# Altium PCB PCB.pcbdoc (part 2 of 2)
Units mm, origin at the board's own origin, x right, y up, seen from the top; angles counter-clockwise.
Board outline 290.83 x 119.38 mm, 2 copper layers (Top Layer, Bottom Layer); 91 components, 196 nets, 972 pads, 129 vias.
Unrouted connection lines stored in the file: 1.
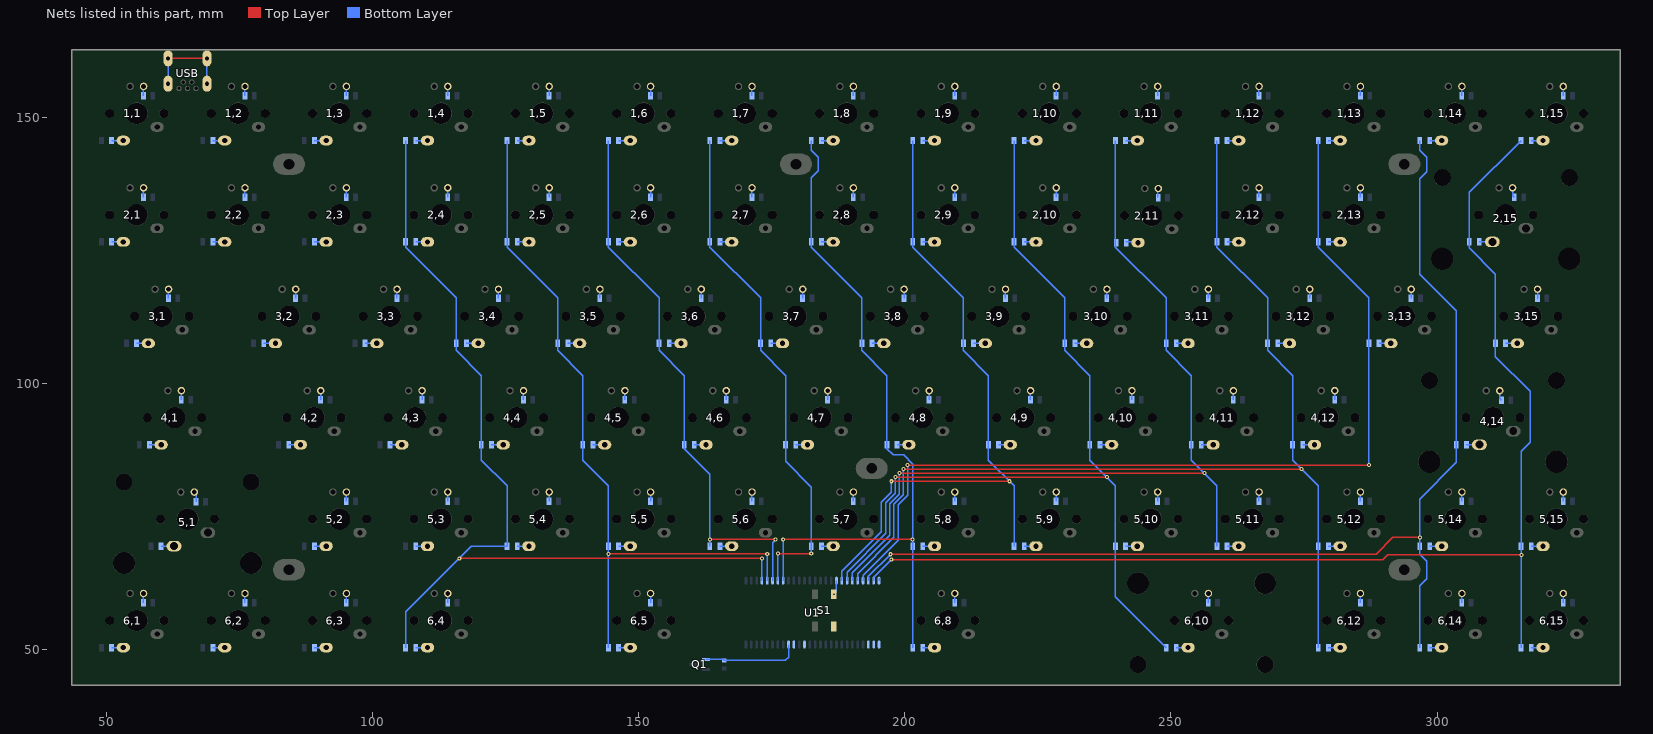
[diagram p2: the nets of this part, all layers, seen from the top]

## Via types
v1: diameter 0.762, hole 0.356, Top Layer to Bottom Layer, 129 vias

## Nets (pads, with @x,y where several pads share a name; then routed paths per layer and width w, separated by ;. In a path a pad name is that pad's centre, name@x,y a point inside that pad or via, vN(x,y) a via of type N, cw(c..) or ccw(c..) an arc to the next point about the centre after c; other vN are vias at no path point) (continued)
LIE4: 1,4.2 2,4.2 3,4.2 4,4.2 5,4.2 6,4.2 U1.4 | length 176
  Top Layer w0.254: v1(116.332,67.183) v1(173.18,67.183)
  Bottom Layer w0.254: 106.248,50.418 106.248,57.099 118.617,69.468 125.298,69.468 125.298,80.823 120.472,85.649 120.472,88.518 120.472,101.524 115.773,106.223 115.773,107.568 115.773,116.129 106.248,125.654 106.248,126.618 106.248,145.668 ; U1.4@173.18,62.992 v1(173.18,67.183)
LIE5: 1,5.2 2,5.2 3,5.2 4,5.2 5,5.2 6,5.2 U1.5 | length 138
  Top Layer w0.254: v1(144.335,68.009) v1(174.18,68.009)
  Bottom Layer w0.254: 125.298,145.668 125.298,126.618 125.298,125.654 134.823,116.129 134.823,107.568 134.823,106.223 139.522,101.524 139.522,88.518 139.522,85.649 144.348,80.823 144.348,69.468 144.348,50.418 ; U1.5@174.18,62.992 v1(174.18,68.009)
LIE6: 1,6.2 2,6.2 3,6.2 4,6.2 5,6.2 U1.6 | length 104.5
  Top Layer w0.254: v1(163.398,70.739) v1(175.768,70.739)
  Bottom Layer w0.254: 144.348,145.668 144.348,126.618 144.348,125.654 153.873,116.129 153.873,107.568 153.873,106.223 158.572,101.524 158.572,88.518 158.572,87.808 163.398,82.982 163.398,69.468 ; U1.6@175.18,62.992 175.18,70.151 v1(175.768,70.739)
LIE7: 1,7.2 2,7.2 3,7.2 4,7.2 5,7.2 U1.7 | length 96.8
  Top Layer w0.254: v1(176.18,68.072) v1(182.448,68.072)
  Bottom Layer w0.254: 163.398,145.668 163.398,126.618 163.398,125.654 172.923,116.129 172.923,107.568 172.923,106.223 177.622,101.524 177.622,88.518 177.622,85.395 182.448,80.569 182.448,69.468 v1(182.448,68.072) ; U1.7@176.18,62.992 v1(176.18,68.072)
LIE8: 1,8.2 2,8.2 3,8.2 4,8.2 5,8.2 6,8.2 U1.8 | length 137.4
  Top Layer w0.254: v1(177.18,70.739) v1(201.498,70.739)
  Bottom Layer w0.254: U1.8@177.18,62.992 v1(177.18,70.739) ; 182.448,145.668 182.448,143.8 183.769,142.479 183.769,139.954 182.448,138.633 182.448,126.618 182.448,125.654 191.973,116.129 191.973,107.568 191.973,106.223 196.672,101.524 196.672,88.518 196.672,87.808 197.879,86.601 199.784,86.601 201.498,84.887 v1(201.498,70.739) 201.498,69.468 201.498,50.418
LIE9: 1,9.2 2,9.2 3,9.2 4,9.2 5,9.2 U1.19 | length 128.8
  Top Layer w0.254: v1(197.485,81.661) v1(219.71,81.661)
  Bottom Layer w0.254: U1.19@188.18,62.992 188.18,64.736 195.58,72.136 195.58,77.724 197.485,79.629 v1(197.485,81.661) ; 201.498,145.668 201.498,126.618 201.498,125.654 211.023,116.129 211.023,107.568 211.023,106.223 215.722,101.524 215.722,88.518 215.722,85.649 220.548,80.823 220.548,69.468
LIE10: 1,10.2 2,10.2 3,10.2 4,10.2 5,10.2 6,10.2 U1.20 | length 170
  Top Layer w0.254: v1(198.247,82.423) v1(237.998,82.423)
  Bottom Layer w0.254: U1.20@189.18,62.992 189.18,64.593 196.469,71.882 196.469,77.597 198.247,79.375 v1(198.247,82.423) ; 220.548,145.668 220.548,126.618 220.548,125.654 230.073,116.129 230.073,107.568 230.073,106.223 234.772,101.524 234.772,88.518 234.772,85.649 239.598,80.823 239.598,69.468 239.598,59.943 249.123,50.418
LIE11: 1,11.2 2,11.2 3,11.2 4,11.2 5,11.2 U1.21 | length 165.2
  Top Layer w0.254: v1(199.009,83.185) v1(256.286,83.185)
  Bottom Layer w0.254: U1.21@190.18,62.992 190.18,64.45 197.231,71.501 197.231,77.47 199.009,79.248 v1(199.009,83.185) ; 239.598,145.668 239.598,125.654 249.123,116.129 249.123,107.568 249.123,106.223 253.822,101.524 253.822,88.518 253.822,85.649 258.648,80.823 258.648,69.468
LIE12: 1,12.2 2,12.2 3,12.2 4,12.2 5,12.2 6,12.2 U1.22 | length 202.5
  Top Layer w0.254: v1(199.771,83.947) v1(274.574,83.947)
  Bottom Layer w0.254: U1.22@191.18,62.992 191.18,64.307 197.993,71.12 197.993,77.343 199.771,79.121 v1(199.771,83.947) ; 258.648,145.668 258.648,126.618 258.648,125.654 268.173,116.129 268.173,107.568 268.173,106.223 272.872,101.524 272.872,88.518 272.872,85.649 277.698,80.823 277.698,69.468 277.698,50.418
LIE13: 1,13.2 2,13.2 3,13.2 U1.23 | length 176.8
  Top Layer w0.254: v1(200.533,84.709) v1(287.223,84.709)
  Bottom Layer w0.254: U1.23@192.18,62.992 192.18,64.037 198.755,70.612 198.755,77.216 200.533,78.994 v1(200.533,84.709) ; 277.698,145.668 277.698,126.618 277.698,125.654 287.223,116.129 287.223,107.568 v1(287.223,84.709)
LIE14: 1,14.2 4,14.2 5,14.2 6,14.2 U1.24 | length 210.6
  Top Layer w0.254: v1(197.358,67.945) 288.544,67.945 291.719,71.12 v1(296.799,71.12)
  Bottom Layer w0.254: U1.24@193.18,62.992 193.18,63.767 v1(197.358,67.945) ; 296.748,50.418 296.748,62.052 298.069,63.373 298.069,66.624 296.748,67.945 296.748,69.468 296.748,78.308 303.632,85.192 303.632,88.519 303.632,113.69 296.748,120.574 296.748,138.506 298.069,139.827 298.069,142.494 296.748,143.815 296.748,145.668
LIE15: 1,15.2 2,15.2 3,15.2 5,15.2 6,15.2 U1.25 | length 228.8
  Top Layer w0.254: v1(197.485,66.929) 289.814,66.929 290.703,67.818 v1(315.849,67.818)
  Bottom Layer w0.254: U1.25@194.18,62.992 194.18,63.624 v1(197.485,66.929) ; 315.798,50.418 315.798,69.468 315.798,87.325 317.5,89.027 317.5,98.552 310.972,105.08 310.972,107.568 310.972,120.574 306.045,125.501 306.045,126.619 306.045,135.915 315.798,145.668
LIE16: U1.26 | length 0.5
  Bottom Layer w0.254: U1.26@195.18,62.992 U1.26@195.18,63.481
LIE17: U1.27
LIE18: U1.28
LIE19: U1.29
Net1,1_4: 1,1.4 1,1.7 | length 1.8
  Bottom Layer w0.254: 57.003,154.101 57.003,155.809 57.023,155.829 57.035,155.817
Net1,1_5: 1,1.5 1,1.6 | length 2.2
  Bottom Layer w0.254: 51.003,145.668 53.212,145.668
Net1,2_4: 1,2.4 1,2.7 | length 1.8
  Bottom Layer w0.254: 76.053,154.101 76.053,155.809 76.073,155.829 76.085,155.817
Net1,2_5: 1,2.5 1,2.6 | length 2.4
  Bottom Layer w0.254: 70.053,145.668 72.262,145.668 ; 72.143,145.789 72.263,145.669
Net1,3_4: 1,3.4 1,3.7 | length 1.8
  Bottom Layer w0.254: 95.103,154.101 95.103,155.809 95.123,155.829 ; 95.123,155.829 95.135,155.817 95.123,155.829
Net1,3_5: 1,3.5 1,3.6 | length 2.5
  Bottom Layer w0.254: 89.103,145.668 91.312,145.668 ; 91.193,145.789 91.313,145.669 91.193,145.789
Net1,4_4: 1,4.4 1,4.7 | length 1.8
  Bottom Layer w0.254: 114.153,154.101 114.153,155.809 114.173,155.829 114.185,155.817
Net1,4_5: 1,4.5 1,4.6 | length 2.4
  Bottom Layer w0.254: 108.153,145.668 110.362,145.668 ; 110.243,145.789 110.363,145.669
Net1,5_4: 1,5.4 1,5.7 | length 1.8
  Bottom Layer w0.254: 133.203,154.101 133.203,155.809 133.223,155.829 133.235,155.817
Net1,5_5: 1,5.5 1,5.6 | length 2.4
  Bottom Layer w0.254: 127.203,145.668 129.412,145.668 ; 129.293,145.789 129.413,145.669
Net1,6_4: 1,6.4 1,6.7 | length 1.8
  Bottom Layer w0.254: 152.253,154.101 152.253,155.809 152.273,155.829 152.285,155.817
Net1,6_5: 1,6.5 1,6.6 | length 2.4
  Bottom Layer w0.254: 146.253,145.668 148.462,145.668 ; 148.343,145.789 148.463,145.669
Net1,7_4: 1,7.4 1,7.7 | length 1.8
  Bottom Layer w0.254: 171.303,154.101 171.303,155.809 171.323,155.829 171.335,155.817
Net1,7_5: 1,7.5 1,7.6 | length 2.4
  Bottom Layer w0.254: 165.303,145.668 167.512,145.668 ; 167.393,145.789 167.513,145.669
Net1,8_4: 1,8.4 1,8.7 | length 1.8
  Bottom Layer w0.254: 190.353,154.101 190.353,155.809 190.373,155.829 190.385,155.817
Net1,8_5: 1,8.5 1,8.6 | length 2.4
  Bottom Layer w0.254: 184.353,145.668 186.562,145.668 ; 186.443,145.789 186.563,145.669
Net1,9_4: 1,9.4 1,9.7 | length 1.8
  Bottom Layer w0.254: 209.403,154.101 209.403,155.809 209.423,155.829 209.435,155.817
Net1,9_5: 1,9.5 1,9.6 | length 2.4
  Bottom Layer w0.254: 203.403,145.668 205.612,145.668 ; 205.493,145.789 205.613,145.669
Net1,10_4: 1,10.4 1,10.7 | length 1.8
  Bottom Layer w0.254: 228.453,154.101 228.453,155.809 228.473,155.829 228.485,155.817
Net1,10_5: 1,10.5 1,10.6 | length 2.4
  Bottom Layer w0.254: 222.453,145.668 224.662,145.668 ; 224.543,145.789 224.663,145.669
Net1,11_4: 1,11.4 1,11.7 | length 1.8
  Bottom Layer w0.254: 247.503,154.101 247.503,155.809 247.523,155.829 247.535,155.817
Net1,11_5: 1,11.5 1,11.6 | length 2.4
  Bottom Layer w0.254: 241.503,145.668 243.712,145.668 ; 243.593,145.789 243.713,145.669
Net1,12_4: 1,12.4 1,12.7 | length 1.8
  Bottom Layer w0.254: 266.553,154.101 266.553,155.809 266.573,155.829 266.585,155.817
Net1,12_5: 1,12.5 1,12.6 | length 2.4
  Bottom Layer w0.254: 260.553,145.668 262.762,145.668 ; 262.643,145.789 262.763,145.669
Net1,13_4: 1,13.4 1,13.7 | length 1.8
  Bottom Layer w0.254: 285.603,154.101 285.603,155.809 285.623,155.829 285.635,155.817
Net1,13_5: 1,13.5 1,13.6 | length 2.4
  Bottom Layer w0.254: 279.603,145.668 281.812,145.668 ; 281.693,145.789 281.813,145.669
Net1,14_4: 1,14.4 1,14.7 | length 1.8
  Bottom Layer w0.254: 304.653,154.101 304.653,155.809 304.673,155.829 304.685,155.817
Net1,14_5: 1,14.5 1,14.6 | length 2.4
  Bottom Layer w0.254: 298.653,145.668 300.862,145.668 ; 300.743,145.789 300.863,145.669
Net1,15_4: 1,15.4 1,15.7 | length 1.7
  Bottom Layer w0.254: 323.703,154.101 323.723,154.121 323.723,155.829
Net1,15_5: 1,15.5 1,15.6 | length 2.2
  Bottom Layer w0.254: 317.703,145.668 319.912,145.668
Net2,1_4: 2,1.4 2,1.7 | length 1.8
  Bottom Layer w0.254: 57.003,135.051 57.003,136.759 57.023,136.779 57.035,136.767
Net2,1_5: 2,1.5 2,1.6 | length 2.4
  Bottom Layer w0.254: 51.003,126.618 53.212,126.618 ; 53.093,126.739 53.213,126.619
Net2,2_4: 2,2.4 2,2.7 | length 1.8
  Bottom Layer w0.254: 76.053,135.051 76.053,136.759 76.073,136.779 76.085,136.767
Net2,2_5: 2,2.5 2,2.6 | length 2.4
  Bottom Layer w0.254: 70.053,126.618 72.262,126.618 ; 72.143,126.739 72.263,126.619
Net2,3_4: 2,3.4 2,3.7 | length 1.8
  Bottom Layer w0.254: 95.103,135.051 95.103,136.759 95.123,136.779 95.135,136.767
Net2,3_5: 2,3.5 2,3.6 | length 2.4
  Bottom Layer w0.254: 89.103,126.618 91.312,126.618 ; 91.193,126.739 91.313,126.619
Net2,4_4: 2,4.4 2,4.7 | length 1.8
  Bottom Layer w0.254: 114.153,135.051 114.153,136.759 114.173,136.779 114.185,136.767
Net2,4_5: 2,4.5 2,4.6 | length 2.4
  Bottom Layer w0.254: 108.153,126.618 110.362,126.618 ; 110.243,126.739 110.363,126.619
Net2,5_4: 2,5.4 2,5.7 | length 1.8
  Bottom Layer w0.254: 133.203,135.051 133.203,136.759 133.223,136.779 133.235,136.767
Net2,5_5: 2,5.5 2,5.6 | length 2.4
  Bottom Layer w0.254: 127.203,126.618 129.412,126.618 ; 129.293,126.739 129.413,126.619
Net2,6_4: 2,6.4 2,6.7 | length 1.8
  Bottom Layer w0.254: 152.253,135.051 152.253,136.759 152.273,136.779 152.285,136.767
Net2,6_5: 2,6.5 2,6.6 | length 2.4
  Bottom Layer w0.254: 146.253,126.618 148.462,126.618 ; 148.343,126.739 148.463,126.619
Net2,7_4: 2,7.4 2,7.7 | length 1.8
  Bottom Layer w0.254: 171.303,135.051 171.303,136.759 171.323,136.779 171.335,136.767
Net2,7_5: 2,7.5 2,7.6 | length 2.4
  Bottom Layer w0.254: 165.303,126.618 167.512,126.618 ; 167.393,126.739 167.513,126.619
Net2,8_4: 2,8.4 2,8.7 | length 1.8
  Bottom Layer w0.254: 190.353,135.051 190.353,136.759 190.373,136.779 190.385,136.767
Net2,8_5: 2,8.5 2,8.6 | length 2.4
  Bottom Layer w0.254: 184.353,126.618 186.562,126.618 ; 186.443,126.739 186.563,126.619
Net2,9_4: 2,9.4 2,9.7 | length 1.8
  Bottom Layer w0.254: 209.403,135.051 209.403,136.759 209.423,136.779 209.435,136.767
Net2,9_5: 2,9.5 2,9.6 | length 2.4
  Bottom Layer w0.254: 203.403,126.618 205.612,126.618 ; 205.493,126.739 205.613,126.619
Net2,10_4: 2,10.4 2,10.7 | length 1.8
  Bottom Layer w0.254: 228.453,135.051 228.453,136.759 228.473,136.779 228.485,136.767
Net2,10_5: 2,10.5 2,10.6 | length 2.4
  Bottom Layer w0.254: 222.453,126.618 224.662,126.618 ; 224.543,126.739 224.663,126.619
Net2,11_4: 2,11.4 2,11.7 | length 1.8
  Bottom Layer w0.254: 247.503,135.051 247.503,136.759 247.523,136.779 247.535,136.767
Net2,11_5: 2,11.5 2,11.6 | length 2.4
  Bottom Layer w0.254: 241.503,126.618 243.712,126.618 ; 243.593,126.739 243.713,126.619
Net2,12_4: 2,12.4 2,12.7 | length 1.8
  Bottom Layer w0.254: 266.553,135.051 266.553,136.759 266.573,136.779 266.585,136.767
Net2,12_5: 2,12.5 2,12.6 | length 2.4
  Bottom Layer w0.254: 260.553,126.618 262.762,126.618 ; 262.643,126.739 262.763,126.619
Net2,13_4: 2,13.4 2,13.7 | length 1.7
  Bottom Layer w0.254: 285.603,135.051 285.623,135.071 285.623,136.779
Net2,13_5: 2,13.5 2,13.6 | length 2.2
  Bottom Layer w0.254: 279.603,126.618 281.812,126.618
Net2,15_4: 2,15.4 2,15.7 | length 1.9
  Bottom Layer w0.254: 314.198,136.779 314.198,135.331 314.528,135.001
Net2,15_5: 2,15.5 2,15.6 | length 2.4
  Bottom Layer w0.254: 307.95,126.619 310.388,126.619
Net3,1_4: 3,1.4 3,1.7 | length 1.8
  Bottom Layer w0.254: 61.702,116.001 61.702,117.709 61.722,117.729 61.734,117.717
Net3,1_5: 3,1.5 3,1.6 | length 2.2
  Bottom Layer w0.254: 55.702,107.568 57.911,107.568
Net3,2_4: 3,2.4 3,2.7 | length 1.8
  Bottom Layer w0.254: 85.578,116.001 85.578,117.709 85.598,117.729 85.61,117.717
Net3,2_5: 3,2.5 3,2.6 | length 2.4
  Bottom Layer w0.254: 79.578,107.568 81.787,107.568 ; 81.668,107.689 81.788,107.569
Net3,3_4: 3,3.4 3,3.7 | length 1.8
  Bottom Layer w0.254: 104.628,116.001 104.628,117.709 104.648,117.729 104.66,117.717
Net3,3_5: 3,3.5 3,3.6 | length 2.4
  Bottom Layer w0.254: 98.628,107.568 100.837,107.568 ; 100.718,107.689 100.838,107.569
Net3,4_4: 3,4.4 3,4.7 | length 1.8
  Bottom Layer w0.254: 123.678,116.001 123.678,117.709 123.698,117.729 123.71,117.717
Net3,4_5: 3,4.5 3,4.6 | length 2.4
  Bottom Layer w0.254: 117.678,107.568 119.887,107.568 ; 119.768,107.689 119.888,107.569
Net3,5_4: 3,5.4 3,5.7 | length 1.8
  Bottom Layer w0.254: 142.728,116.001 142.728,117.709 142.748,117.729 142.76,117.717
Net3,5_5: 3,5.5 3,5.6 | length 2.4
  Bottom Layer w0.254: 136.728,107.568 138.937,107.568 ; 138.818,107.689 138.938,107.569
Net3,6_4: 3,6.4 3,6.7 | length 1.8
  Bottom Layer w0.254: 161.778,116.001 161.778,117.709 161.798,117.729 161.81,117.717
Net3,6_5: 3,6.5 3,6.6 | length 2.4
  Bottom Layer w0.254: 155.778,107.568 157.987,107.568 ; 157.868,107.689 157.988,107.569
Net3,7_4: 3,7.4 3,7.7 | length 1.8
  Bottom Layer w0.254: 180.828,116.001 180.828,117.709 180.848,117.729 180.86,117.717
Net3,7_5: 3,7.5 3,7.6 | length 2.4
  Bottom Layer w0.254: 174.828,107.568 177.037,107.568 ; 176.918,107.689 177.038,107.569
Net3,8_4: 3,8.4 3,8.7 | length 1.8
  Bottom Layer w0.254: 199.878,116.001 199.878,117.709 199.898,117.729 199.91,117.717
Net3,8_5: 3,8.5 3,8.6 | length 2.4
  Bottom Layer w0.254: 193.878,107.568 196.087,107.568 ; 195.968,107.689 196.088,107.569
Net3,9_4: 3,9.4 3,9.7 | length 1.8
  Bottom Layer w0.254: 218.928,116.001 218.928,117.709 218.948,117.729 218.96,117.717
Net3,9_5: 3,9.5 3,9.6 | length 2.4
  Bottom Layer w0.254: 212.928,107.568 215.137,107.568 ; 215.018,107.689 215.138,107.569
Net3,10_4: 3,10.4 3,10.7 | length 1.8
  Bottom Layer w0.254: 237.978,116.001 237.978,117.709 237.998,117.729 238.01,117.717
Net3,10_5: 3,10.5 3,10.6 | length 2.4
  Bottom Layer w0.254: 231.978,107.568 234.187,107.568 ; 234.068,107.689 234.188,107.569
Net3,11_4: 3,11.4 3,11.7 | length 1.8
  Bottom Layer w0.254: 257.028,116.001 257.028,117.709 257.048,117.729 257.06,117.717
Net3,11_5: 3,11.5 3,11.6 | length 2.4
  Bottom Layer w0.254: 251.028,107.568 253.237,107.568 ; 253.118,107.689 253.238,107.569
Net3,12_4: 3,12.4 3,12.7 | length 1.8
  Bottom Layer w0.254: 276.078,116.001 276.078,117.709 276.098,117.729 276.11,117.717
Net3,12_5: 3,12.5 3,12.6 | length 2.4
  Bottom Layer w0.254: 270.078,107.568 272.287,107.568 ; 272.168,107.689 272.288,107.569
Net3,13_4: 3,13.4 3,13.7 | length 1.8
  Bottom Layer w0.254: 295.128,116.001 295.128,117.709 295.148,117.729 295.16,117.717
Net3,13_5: 3,13.5 3,13.6 | length 2.4
  Bottom Layer w0.254: 289.128,107.568 291.337,107.568 ; 291.218,107.689 291.338,107.569
Net3,15_4: 3,15.4 3,15.7 | length 1.7
  Bottom Layer w0.254: 318.877,116.001 318.897,116.021 318.897,117.729
Net3,15_5: 3,15.5 3,15.6 | length 2.2
  Bottom Layer w0.254: 312.877,107.568 315.086,107.568
Net4,1_4: 4,1.4 4,1.7 | length 1.8
  Bottom Layer w0.254: 64.115,96.951 64.115,98.659 64.135,98.679 64.147,98.667
Net4,1_5: 4,1.5 4,1.6 | length 2.2
  Bottom Layer w0.254: 58.115,88.518 60.324,88.518
Net4,2_4: 4,2.4 4,2.7 | length 1.8
  Bottom Layer w0.254: 90.277,96.951 90.277,98.659 90.297,98.679 90.309,98.667
Net4,2_5: 4,2.5 4,2.6 | length 2.4
  Bottom Layer w0.254: 84.277,88.518 86.486,88.518 ; 86.367,88.639 86.487,88.519
Net4,3_4: 4,3.4 4,3.7 | length 1.8
  Bottom Layer w0.254: 109.327,96.951 109.327,98.659 109.347,98.679 109.359,98.667
Net4,3_5: 4,3.5 4,3.6 | length 2.4
  Bottom Layer w0.254: 103.327,88.518 105.536,88.518 ; 105.417,88.639 105.537,88.519
Net4,4_4: 4,4.4 4,4.7 | length 1.8
  Bottom Layer w0.254: 128.377,96.951 128.377,98.659 128.397,98.679 128.409,98.667
Net4,4_5: 4,4.5 4,4.6 | length 2.4
  Bottom Layer w0.254: 122.377,88.518 124.586,88.518 ; 124.467,88.639 124.587,88.519
Net4,5_4: 4,5.4 4,5.7 | length 1.8
  Bottom Layer w0.254: 147.427,96.951 147.427,98.659 147.447,98.679 147.459,98.667
Net4,5_5: 4,5.5 4,5.6 | length 2.4
  Bottom Layer w0.254: 141.427,88.518 143.636,88.518 ; 143.517,88.639 143.637,88.519
Net4,6_4: 4,6.4 4,6.7 | length 1.8
  Bottom Layer w0.254: 166.477,96.951 166.477,98.659 166.497,98.679 166.509,98.667
Net4,6_5: 4,6.5 4,6.6 | length 2.4
  Bottom Layer w0.254: 160.477,88.518 162.686,88.518 ; 162.567,88.639 162.687,88.519
Net4,7_4: 4,7.4 4,7.7 | length 1.8
  Bottom Layer w0.254: 185.527,96.951 185.527,98.659 185.547,98.679 185.559,98.667
Net4,7_5: 4,7.5 4,7.6 | length 2.4
  Bottom Layer w0.254: 179.527,88.518 181.736,88.518 ; 181.617,88.639 181.737,88.519
Net4,8_4: 4,8.4 4,8.7 | length 1.8
  Bottom Layer w0.254: 204.577,96.951 204.577,98.659 204.597,98.679 204.609,98.667
Net4,8_5: 4,8.5 4,8.6 | length 2.4
  Bottom Layer w0.254: 198.577,88.518 200.786,88.518 ; 200.667,88.639 200.787,88.519
Net4,9_4: 4,9.4 4,9.7 | length 1.8
  Bottom Layer w0.254: 223.627,96.951 223.627,98.659 223.647,98.679 223.659,98.667
Net4,9_5: 4,9.5 4,9.6 | length 2.4
  Bottom Layer w0.254: 217.627,88.518 219.836,88.518 ; 219.717,88.639 219.837,88.519
Net4,10_4: 4,10.4 4,10.7 | length 1.8
  Bottom Layer w0.254: 242.677,96.951 242.677,98.659 242.697,98.679 242.709,98.667
Net4,10_5: 4,10.5 4,10.6 | length 2.4
  Bottom Layer w0.254: 236.677,88.518 238.886,88.518 ; 238.767,88.639 238.887,88.519
Net4,11_4: 4,11.4 4,11.7 | length 1.8
  Bottom Layer w0.254: 261.727,96.951 261.727,98.659 261.747,98.679 261.759,98.667
Net4,11_5: 4,11.5 4,11.6 | length 2.4
  Bottom Layer w0.254: 255.727,88.518 257.936,88.518 ; 257.817,88.639 257.937,88.519
Net4,12_4: 4,12.4 4,12.7 | length 1.8
  Bottom Layer w0.254: 280.777,96.951 280.777,98.659 280.797,98.679 280.809,98.667
Net4,12_5: 4,12.5 4,12.6 | length 2.4
  Bottom Layer w0.254: 274.777,88.518 276.986,88.518 ; 276.867,88.639 276.987,88.519
Net4,14_4: 4,14.4 4,14.7 | length 1.9
  Bottom Layer w0.254: 311.785,98.679 311.785,97.231 312.115,96.901
Net4,14_5: 4,14.5 4,14.6 | length 2.4
  Bottom Layer w0.254: 305.537,88.519 307.975,88.519
Net5,1_4: 5,1.4 5,1.7 | length 1.9
  Bottom Layer w0.254: 66.548,79.629 66.878,79.299 66.878,77.851
Net5,1_5: 5,1.5 5,1.6 | length 2.4
  Bottom Layer w0.254: 60.3,69.469 62.738,69.469
Net5,2_4: 5,2.4 5,2.7 | length 1.8
  Bottom Layer w0.254: 95.103,77.901 95.103,79.609 95.123,79.629 95.135,79.617
Net5,2_5: 5,2.5 5,2.6 | length 2.4
  Bottom Layer w0.254: 89.103,69.468 91.312,69.468 ; 91.193,69.589 91.313,69.469
Net5,3_4: 5,3.4 5,3.7 | length 1.8
  Bottom Layer w0.254: 114.153,77.901 114.153,79.609 114.173,79.629 114.185,79.617
Net5,3_5: 5,3.5 5,3.6 | length 2.4
  Bottom Layer w0.254: 108.153,69.468 110.362,69.468 ; 110.243,69.589 110.363,69.469
Net5,4_4: 5,4.4 5,4.7 | length 1.8
  Bottom Layer w0.254: 133.203,77.901 133.203,79.609 133.223,79.629 133.235,79.617
Net5,4_5: 5,4.5 5,4.6 | length 2.4
  Bottom Layer w0.254: 127.203,69.468 129.412,69.468 ; 129.293,69.589 129.413,69.469
Net5,5_4: 5,5.4 5,5.7 | length 1.8
  Bottom Layer w0.254: 152.253,77.901 152.253,79.609 152.273,79.629 152.285,79.617
Net5,5_5: 5,5.5 5,5.6 | length 2.4
  Bottom Layer w0.254: 146.253,69.468 148.462,69.468 ; 148.343,69.589 148.463,69.469
Net5,6_4: 5,6.4 5,6.7 | length 1.8
  Bottom Layer w0.254: 171.303,77.901 171.303,79.609 171.323,79.629 171.335,79.617
Net5,6_5: 5,6.5 5,6.6 | length 2.4
  Bottom Layer w0.254: 165.303,69.468 167.512,69.468 ; 167.393,69.589 167.513,69.469
Net5,7_4: 5,7.4 5,7.7 | length 1.8
  Bottom Layer w0.254: 190.353,77.901 190.353,79.609 190.373,79.629 190.385,79.617
Net5,7_5: 5,7.5 5,7.6 | length 2.4
  Bottom Layer w0.254: 184.353,69.468 186.562,69.468 ; 186.443,69.589 186.563,69.469
Net5,8_4: 5,8.4 5,8.7 | length 1.8
  Bottom Layer w0.254: 209.403,77.901 209.403,79.609 209.423,79.629 209.435,79.617
Net5,8_5: 5,8.5 5,8.6 | length 2.4
  Bottom Layer w0.254: 203.403,69.468 205.612,69.468 ; 205.493,69.589 205.613,69.469
Net5,9_4: 5,9.4 5,9.7 | length 1.8
  Bottom Layer w0.254: 228.453,77.901 228.453,79.609 228.473,79.629 228.485,79.617
Net5,9_5: 5,9.5 5,9.6 | length 2.4
  Bottom Layer w0.254: 222.453,69.468 224.662,69.468 ; 224.543,69.589 224.663,69.469
Net5,10_4: 5,10.4 5,10.7 | length 1.8
  Bottom Layer w0.254: 247.503,77.901 247.503,79.609 247.523,79.629 247.535,79.617
Net5,10_5: 5,10.5 5,10.6 | length 2.4
  Bottom Layer w0.254: 241.503,69.468 243.712,69.468 ; 243.593,69.589 243.713,69.469
Net5,11_4: 5,11.4 5,11.7 | length 1.8
  Bottom Layer w0.254: 266.553,77.901 266.553,79.609 266.573,79.629 266.585,79.617
Net5,11_5: 5,11.5 5,11.6 | length 2.4
  Bottom Layer w0.254: 260.553,69.468 262.762,69.468 ; 262.643,69.589 262.763,69.469
Net5,12_4: 5,12.4 5,12.7 | length 1.8
  Bottom Layer w0.254: 285.603,77.901 285.603,79.609 285.623,79.629 285.635,79.617
Net5,12_5: 5,12.5 5,12.6 | length 2.4
  Bottom Layer w0.254: 279.603,69.468 281.812,69.468 ; 281.693,69.589 281.813,69.469
Net5,14_4: 5,14.4 5,14.7 | length 1.8
  Bottom Layer w0.254: 304.653,77.901 304.653,79.609 304.673,79.629 304.685,79.617
Net5,14_5: 5,14.5 5,14.6 | length 2.4
  Bottom Layer w0.254: 298.653,69.468 300.862,69.468 ; 300.743,69.589 300.863,69.469
Net5,15_4: 5,15.4 5,15.7 | length 1.8
  Bottom Layer w0.254: 323.703,77.901 323.703,79.609 323.723,79.629 323.735,79.617
Net5,15_5: 5,15.5 5,15.6 | length 2.2
  Bottom Layer w0.254: 317.703,69.468 319.912,69.468
Net6,1_4: 6,1.4 6,1.7 | length 1.8
  Bottom Layer w0.254: 57.003,58.851 57.003,60.559 57.023,60.579 57.035,60.567
Net6,1_5: 6,1.5 6,1.6 | length 2.2
  Bottom Layer w0.254: 51.003,50.418 53.212,50.418
Net6,2_4: 6,2.4 6,2.7 | length 1.8
  Bottom Layer w0.254: 76.053,58.851 76.053,60.559 76.073,60.579 76.085,60.567
Net6,2_5: 6,2.5 6,2.6 | length 2.2
  Bottom Layer w0.254: 70.053,50.418 72.262,50.418
Net6,3_4: 6,3.4 6,3.7 | length 1.8
  Bottom Layer w0.254: 95.103,58.851 95.103,60.559 95.123,60.579 95.135,60.567
Net6,3_5: 6,3.5 6,3.6 | length 2.2
  Bottom Layer w0.254: 89.103,50.418 91.312,50.418
Net6,4_4: 6,4.4 6,4.7 | length 1.8
  Bottom Layer w0.254: 114.153,58.851 114.153,60.559 114.173,60.579 114.185,60.567
Net6,4_5: 6,4.5 6,4.6 | length 2.2
  Bottom Layer w0.254: 108.153,50.418 110.362,50.418
Net6,5_4: 6,5.4 6,5.7 | length 1.8
  Bottom Layer w0.254: 152.253,58.851 152.253,60.559 152.273,60.579 152.285,60.567
Net6,5_5: 6,5.5 6,5.6 | length 2.2
  Bottom Layer w0.254: 146.253,50.418 148.462,50.418
Net6,8_4: 6,8.4 6,8.7 | length 1.8
  Bottom Layer w0.254: 209.403,58.851 209.403,60.559 209.423,60.579 209.435,60.567
Net6,8_5: 6,8.5 6,8.6 | length 2.2
  Bottom Layer w0.254: 203.403,50.418 205.612,50.418
Net6,10_4: 6,10.4 6,10.7 | length 1.8
  Bottom Layer w0.254: 257.028,58.851 257.028,60.559 257.048,60.579 257.06,60.567
Net6,10_5: 6,10.5 6,10.6 | length 2.2
  Bottom Layer w0.254: 251.028,50.418 253.237,50.418
Net6,12_4: 6,12.4 6,12.7 | length 1.8
  Bottom Layer w0.254: 285.603,58.851 285.603,60.559 285.623,60.579 285.635,60.567
Net6,12_5: 6,12.5 6,12.6 | length 2.2
  Bottom Layer w0.254: 279.603,50.418 281.812,50.418
Net6,14_4: 6,14.4 6,14.7 | length 1.8
  Bottom Layer w0.254: 304.653,58.851 304.653,60.559 304.673,60.579 304.685,60.567
Net6,14_5: 6,14.5 6,14.6 | length 2.2
  Bottom Layer w0.254: 298.653,50.418 300.862,50.418
Net6,15_4: 6,15.4 6,15.7 | length 1.8
  Bottom Layer w0.254: 323.703,58.851 323.703,60.559 323.723,60.579 323.735,60.567
Net6,15_5: 6,15.5 6,15.6 | length 2.2
  Bottom Layer w0.254: 317.703,50.418 319.912,50.418
NetQ1_1: Q1.1 R1.1 U1.44 | length 18.2
  Bottom Layer w0.254: Q1.1@162.651,48.194 165.916,48.194 R1.1@166.116,47.994 177.534,47.994 178.18,48.64 U1.44@178.18,50.992
NUMLED: U1.41
RGBLED: U1.43
RST: S1.1 S1.3 U1.18 | length 2.8
  Bottom Layer w0.254: v1(186.687,60.429) 187.18,60.922 U1.18@187.18,62.992
SHIELD: USB.0 | length 16.8
  Top Layer w0.254: USB.0@61.628,161.098 USB.0@68.928,161.098
  Bottom Layer w0.254: USB.0@61.628,156.348 USB.0@61.628,161.098 ; USB.0@68.928,156.348 USB.0@68.928,161.098
pads on no net: 1,1. 1,2. 1,3. 1,4. 1,5. 1,6. 1,7. 1,8. 1,9. 1,10. 1,11. 1,12. 1,13. 1,14. 1,15. 2,1. 2,2. 2,3. 2,4. 2,5. 2,6. 2,7. 2,8. 2,9. 2,10. 2,11. 2,12. 2,13. 2,15. 2,15.0 3,1. 3,2. 3,3. 3,4. 3,5. 3,6. 3,7. 3,8. 3,9. 3,10. 3,11. 3,12. 3,13. 3,15. 4,1. 4,2. 4,3. 4,4. 4,5. 4,6. 4,7. 4,8. 4,9. 4,10. 4,11. 4,12. 4,14. 4,14.0 5,1. 5,1.0 5,2. 5,3. 5,4. 5,5. 5,6. 5,7. 5,8. 5,9. 5,10. 5,11. 5,12. 5,14. 5,15. 6,1. 6,2. 6,3. 6,4. 6,5. 6,8. 6,10. 6,12. 6,14. 6,15. M1.0 M2.0 M3.0 M4.0 M5.0 M6.0 U1.13 U1.14 U1.15 U1.16 U1.17 U1.30 U1.31 U1.32 U1.33 U1.34 U1.35 U1.36 U1.37 U1.38 U1.40 U1.51 U1.52 USB.4

## Silkscreen, mask and mechanical layers (free items; w line width, h text height)
Mechanical 2:
  lines w0.254: 43.561,43.307 43.561,162.687 334.391,162.687 334.391,43.307 43.688,43.307

## Text inside footprints (layer, text, board x,y; h text height)
USB: Mechanical 1 "PCB Edge" at 61.242,161.955 h0.25 r180